# Altium PCB MemoryBoard_AT25DFxxx-SS.PcbDoc
Units mm, origin at the board's own origin, x right, y up, seen from the top; angles counter-clockwise.
Board outline 44 x 44 mm, 2 copper layers (Top Layer, Bottom Layer), stack 1.571 mm thick; 12 components, 10 nets, 82 pads, 4 vias.
Unrouted connection lines stored in the file: 12.
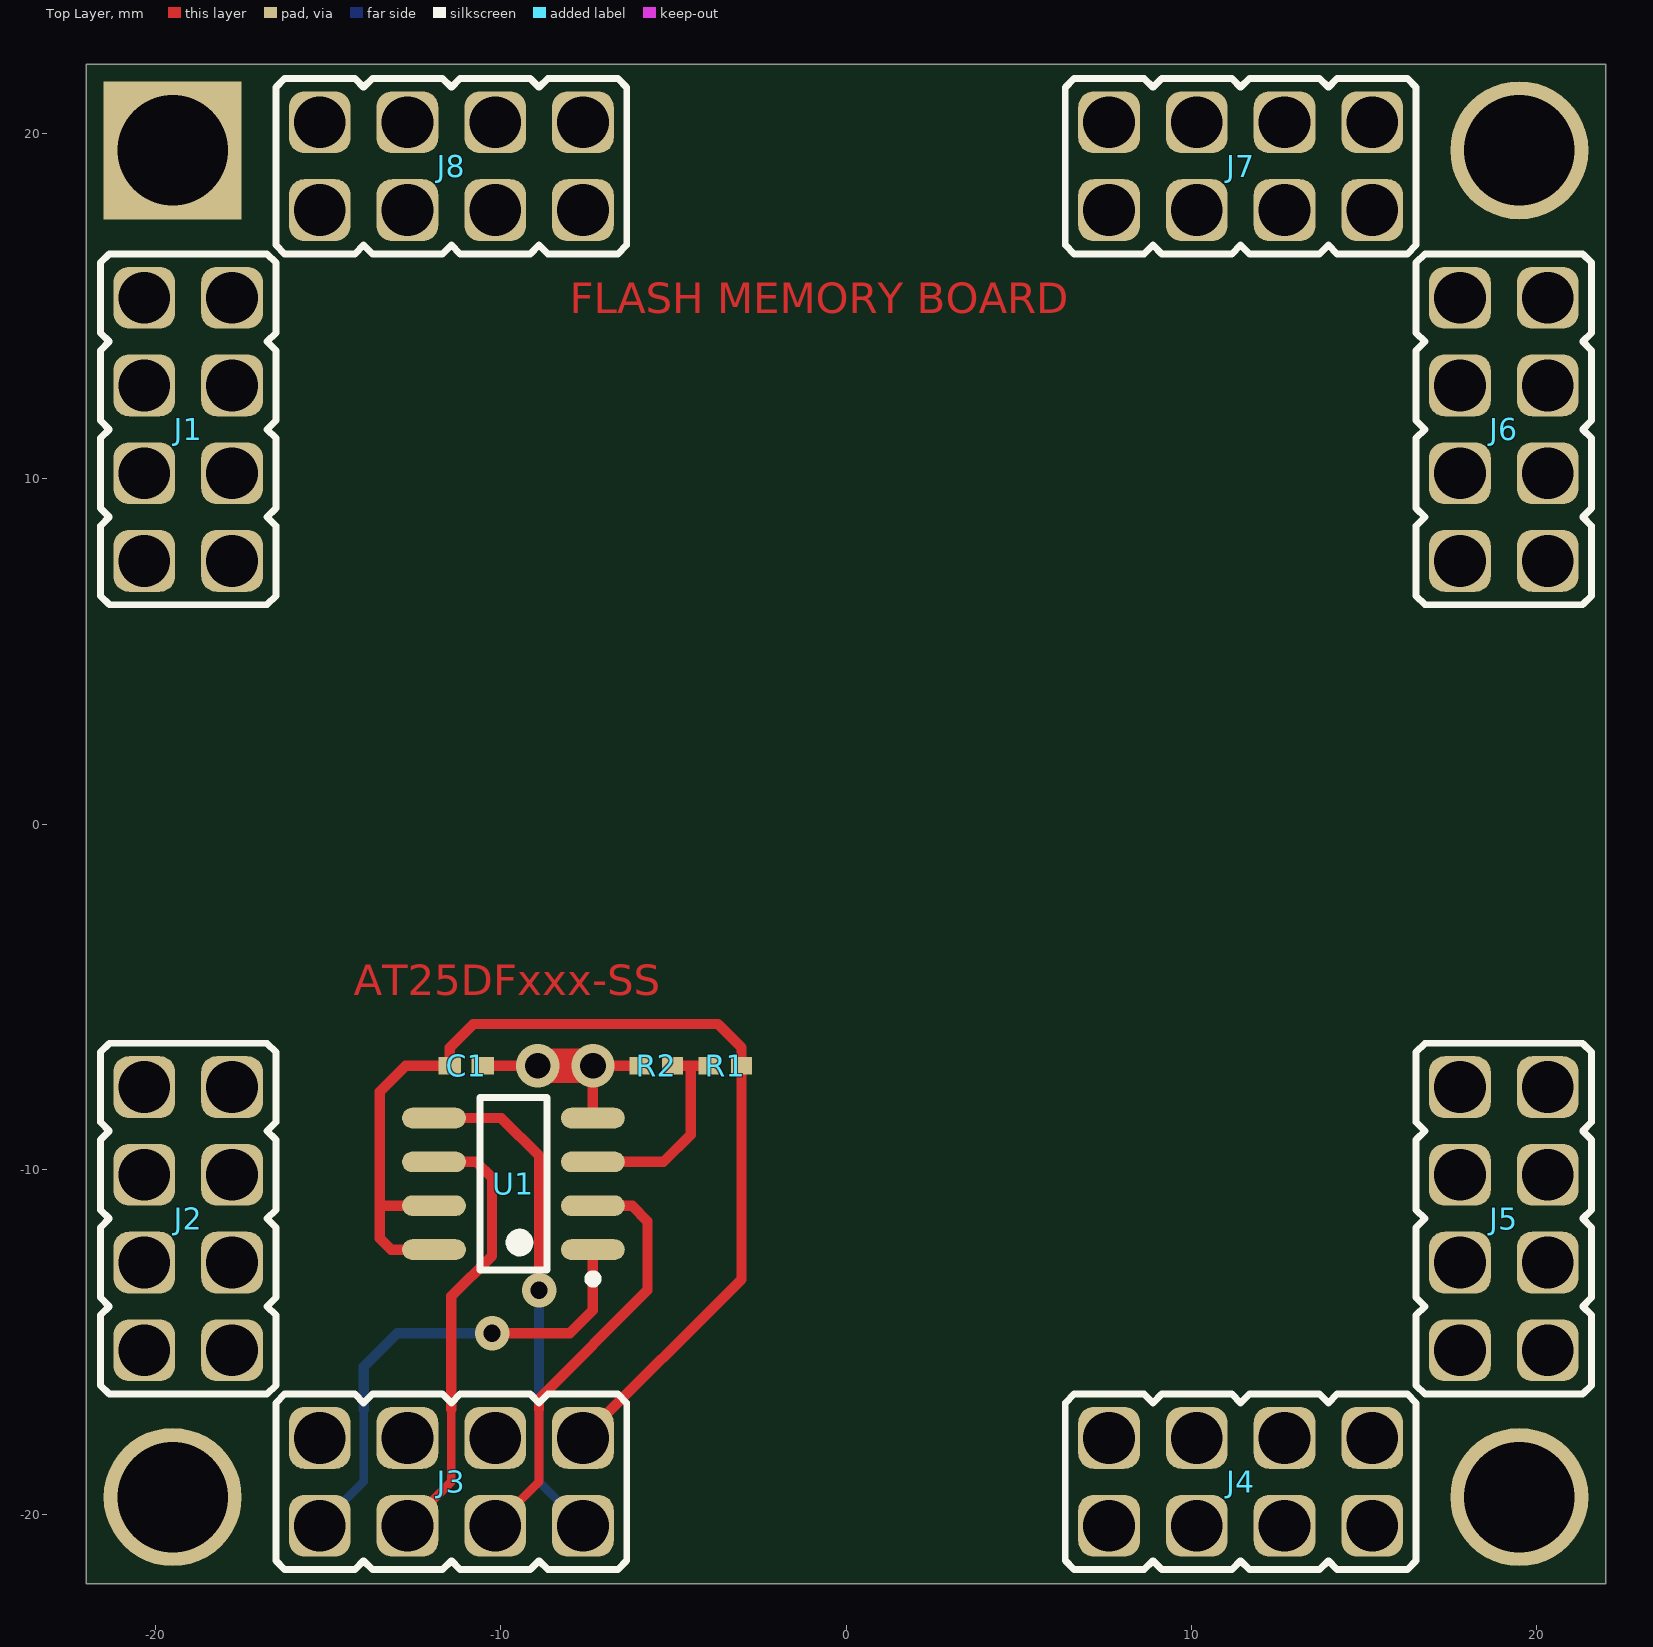
[diagram p0: Top Layer view]
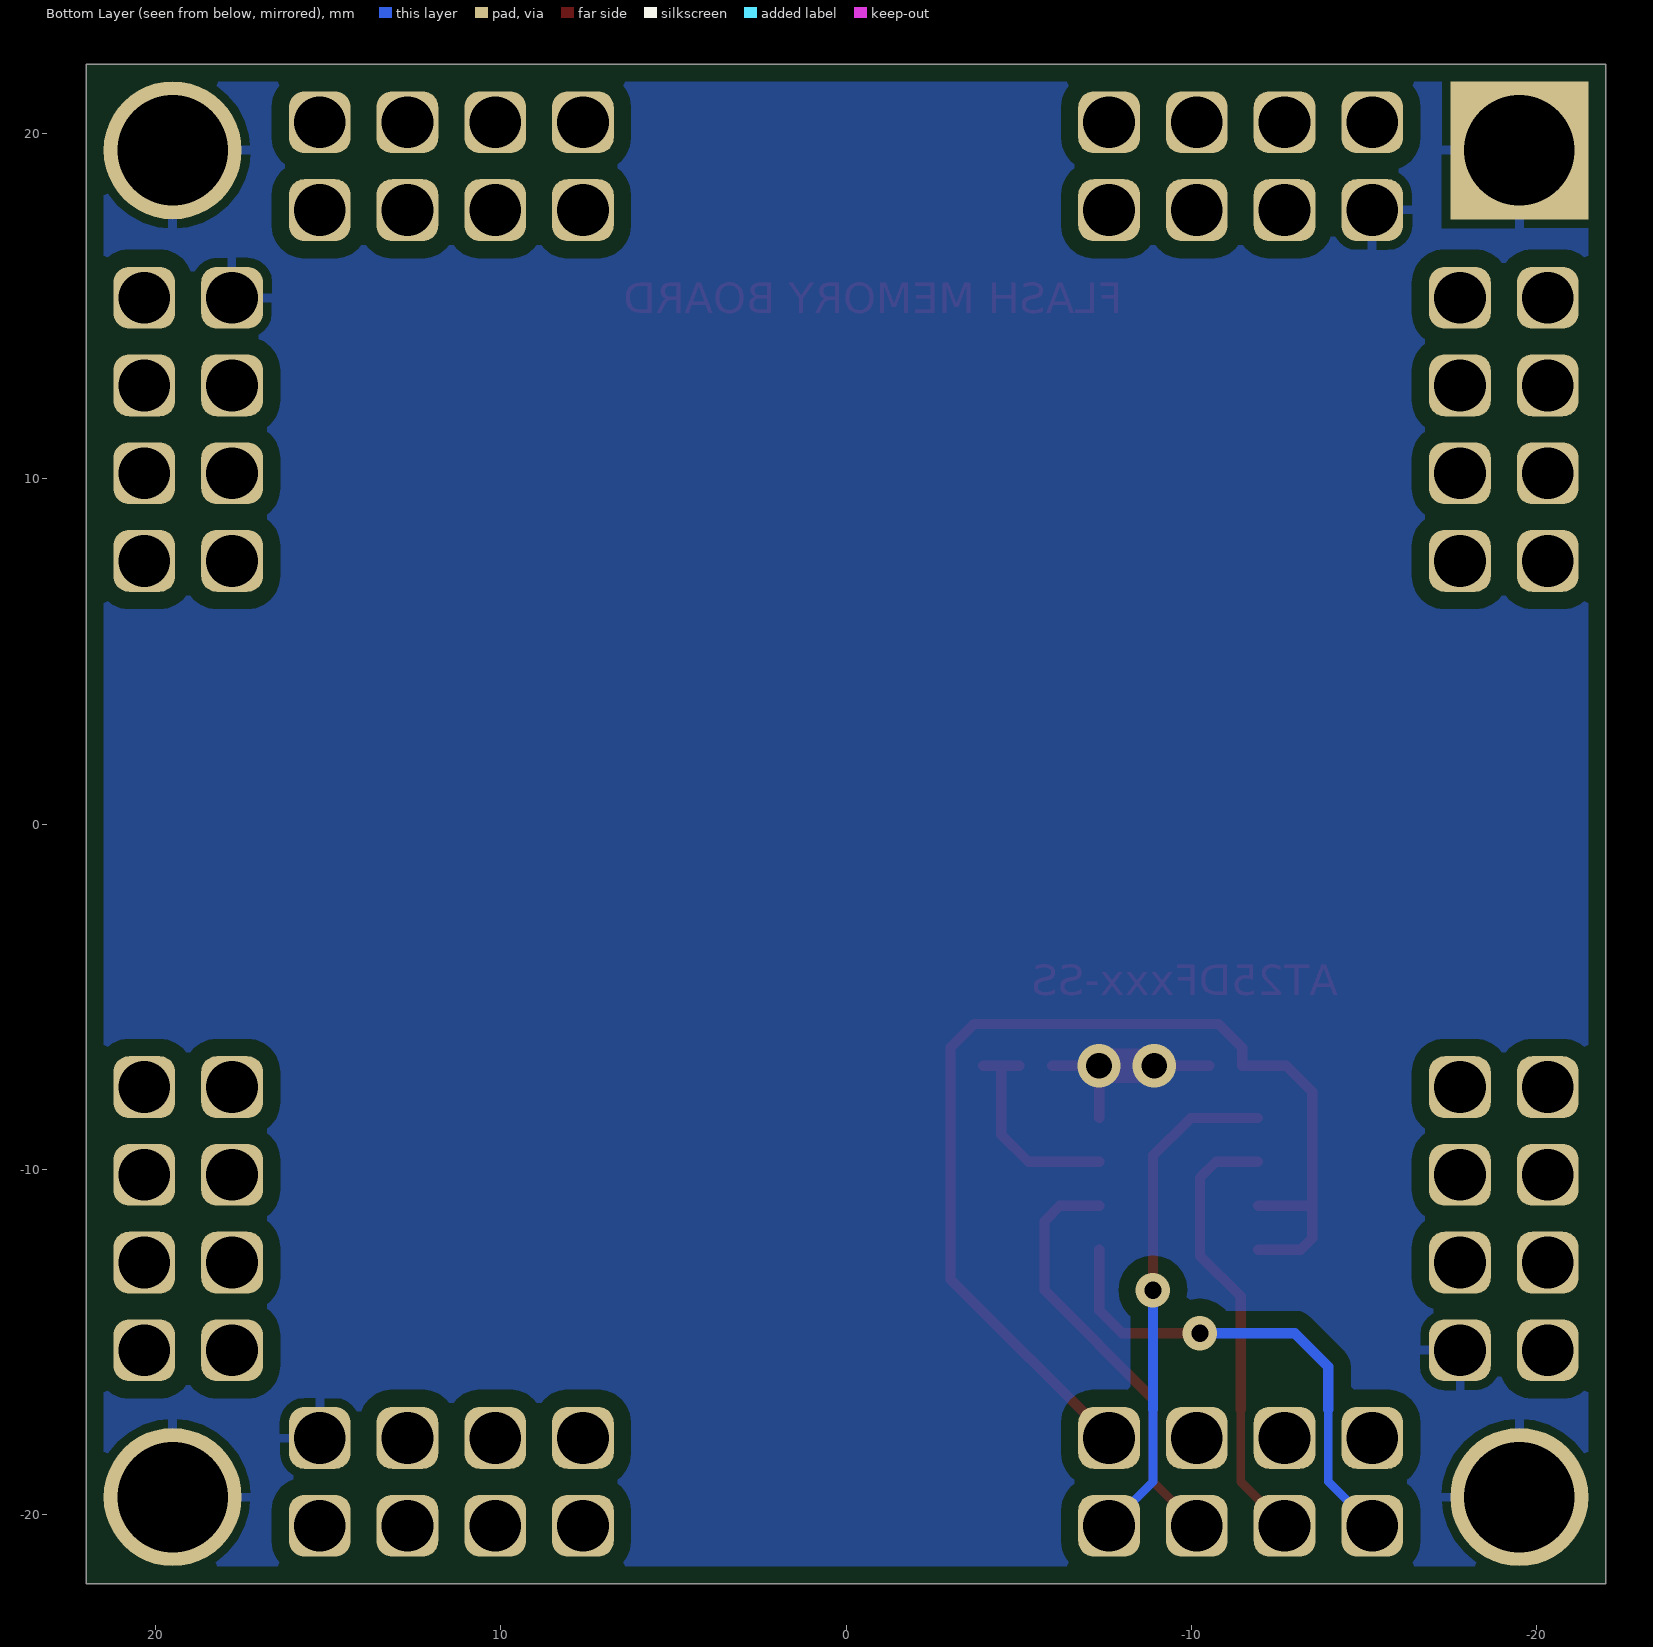
[diagram p1: Bottom Layer view, seen from below]

## Layer stack, top to bottom
Top Solder: solder mask 0.0102, Solder Resist, Dk 3.5
Top Layer: signal copper 0.0356
Dielectric 1: dielectric 1.5, FR-4, Dk 4.8
Bottom Layer: signal copper 0.0356
Bottom Solder: solder mask 0.0102, Solder Resist, Dk 3.5

## Board outline
-22,-22 22,-22 22,22 -22,22

## Design rules (kind name [scope] priority, off if disabled: settings)
Clearance Clearance_Polygon(GND) [InPolygon and InNet('GND')] p1: gap=0.5
Clearance [All] p2: gap=0.25
HoleSize [All] p1: absolutevalues=TRUE maxlimit=4 minlimit=0.3 maxpercent=80.000 minpercent=20.000
PolygonConnect PolygonConnect_Via(GND) [InNet('GND') vs IsVia] p1: connectstyle=Direct reliefconductorwidth=0.254 reliefentries=4 polygonreliefangle="90 Angle" airgapwidth=0.254
PolygonConnect [All] p2: connectstyle=Relief reliefconductorwidth=0.254 reliefentries=4 polygonreliefangle="90 Angle" airgapwidth=0.254
RoutingVias [All] p1: holewidth=0.5 width=1 viastyle="Through Hole" minholewidth=0.5 minwidth=1 maxholewidth=1.5 maxwidth=2
SolderMaskExpansion [All] p1: expansion=0.102
Width [All] p1: maxlimit=2 minlimit=0.25 preferedwidth=0.3
28 further rules are at their usual default settings.

## Components (designator, comment, footprint, x,y, rotation, side; value= is the part's Value field where it differs from the comment)
C1 "0.1/25" CAP0402 -11,-7 r180 top
J1 "LEFT" PBDM-8 -19.05,11.43 r270 top
J2 "LEFT" PBDM-8 -19.05,-11.43 r270 top
J3 "BOTTOM" PBDM-8 -11.43,-19.05 r0 top
J4 "BOTTOM" PBDM-8 11.43,-19.05 r0 top
J5 "RIGHT" PBDM-8 19.05,-11.43 r90 top
J6 "RIGHT" PBDM-8 19.05,11.43 r90 top
J7 "TOP" PBDM-8 11.43,19.05 r180 top
J8 "TOP" PBDM-8 -11.43,19.05 r180 top
R1 "10k" RES0402 -3.5,-7 r180 top
R2 "0" RES0402 -5.5,-7 r180 top
U1 "AT25DF041A-SS" SO8 -9.63,-10.42 r180 top

## Footprints (in the part's own frame and the unit in brackets; to place one, negate y for a bottom-side part, rotate by r counter-clockwise, add the part's x,y. Pads: shape width x height; smd on the part's side, far side on the other; paste and mask are expansions set on the pad)
CAP0402 [mm]
  rect 0.65x0.5 smd: 1(-0.475,0) 2(0.475,0)
  body extent -0.55,-0.3 0.55,0.3, height 0.5
PBDM-8 [mm] "5-pin interboard connector, pitch 2.54 mm"
  rrect50% 1.79x1.79 hole 1.5: 1(-3.81,-1.27) 2(-3.81,1.27) 3(-1.27,-1.27) 4(-1.27,1.27) 5(1.27,-1.27) 6(1.27,1.27) 7(3.81,-1.27) 8(3.81,1.27)
  silkscreen extent -5.08,-2.54 5.08,2.54, body extent -5.08,-2.54 5.08,2.54, height 3
RES0402 [mm]
  rect 0.6x0.5 smd: 1(-0.475,0) 2(0.475,0)
  body extent -0.53,-0.28 0.53,0.28, height 0.35
SO8 [mm] "SOIC, 8-Leads, Body 4,90x3,90mm, Pitch 1,27mm, IPC High Density"
  oval 1.85x0.6 smd: 1(-2.3,1.905) 2(-2.3,0.635) 3(-2.3,-0.635) 4(-2.3,-1.905) 5(2.3,-1.905) 6(2.3,-0.635) 7(2.3,0.635) 8(2.3,1.905)
  silkscreen extent -2.43,-2.5 0.97,2.88, body extent -3,-2.54 3,2.54, height 1.7

## Part data
C1: library part CAP0402, "Ceramic chip capacitor 0402"
J1 J2 J3 J4 J5 J6 J7 J8: library part PBDM-8, "2x4-pin header, pitch 2.54 mm"
R1 R2: library part RES0402, "Ceramic chip resistor"
U1: "4-Mbit Serial Peripheral Interface Serial Flash Memory"

## Free pads (board coordinates)
  round 4 hole 3.2: 0(-19.5,-19.491) 0(19.5,-19.491) 0(19.5,19.509)
  rect 4x4 hole 3.2: 0(-19.5,19.509)

## Via types
v1: diameter 1, hole 0.5, Top Layer to Bottom Layer, 2 vias
v2: diameter 1.25, hole 0.75, Top Layer to Bottom Layer, 2 vias

## Nets (pads, with @x,y where several pads share a name; then routed paths per layer and width w, separated by ;. In a path a pad name is that pad's centre, name@x,y a point inside that pad or via, vN(x,y) a via of type N, cw(c..) or ccw(c..) an arc to the next point about the centre after c; other vN are vias at no path point)
+5V: J1.6 J3.6 J5.6 J7.6
+12V: J1.2 J3.2 J5.2 J7.2
GND: C1.1 J2.8 J4.8 J6.8 J8.8 pad.0 R2.2 U1.4 | length 6.1
  Top Layer w0.3: C1.1 v2(-8.928,-7) ; U1.4 v2(-7.33,-7) R2.2
  Top Layer w1: v2(-8.928,-7) v2(-7.33,-7)
MISO: J3.5 U1.2 | length 12.4
  Top Layer w0.25: J3.5 -8.89,-19.05 -8.89,-16.956
  Top Layer w0.3: -8.89,-16.956 -8.89,-16.64 -5.75,-13.5 -5.75,-11.5 -6.195,-11.055 U1.2
MOSI: J3.7 U1.5 | length 14.7
  Top Layer w0.3: U1.5 -9.985,-8.515 -8.89,-9.61 v1(-8.89,-13.5)
  Bottom Layer w0.25: -8.89,-16.956 -8.89,-19.05 J3.7
  Bottom Layer w0.3: -8.89,-16.956 v1(-8.89,-13.5)
NetR1_2: R1.2 R2.1 U1.3 | length 6.2
  Top Layer w0.3: U1.3 -5.285,-9.785 -4.5,-9 -4.5,-7 ; R2.1 -4.5,-7 ; R1.2 -4.5,-7
S\S\: J3.1 U1.1 | length 14.2
  Top Layer w0.3: v1(-10.25,-14.75) -8,-14.75 -7.33,-14.08 U1.1
  Bottom Layer w0.25: J3.1 -13.97,-19.05 -13.97,-16.956
  Bottom Layer w0.3: -13.97,-16.956 -13.97,-15.72 -13,-14.75 v1(-10.25,-14.75)
SCK: J3.3 U1.6 | length 13
  Top Layer w0.25: J3.3 -11.43,-19.05 -11.43,-16.956
  Top Layer w0.3: U1.6 -10.715,-9.785 -10.25,-10.25 -10.25,-12.5 -11.43,-13.68 -11.43,-16.956
VBAT: J1.4 J3.4 J5.4 J7.4
VCC: C1.2 J1.8 J3.8 J5.8 J7.8 R1.1 U1.7 U1.8 | length 32.6
  Top Layer w0.3: U1.8 -13.175,-12.325 -13.5,-12 -13.5,-11.055 ; U1.7 -13.5,-11.055 ; J3.8 -3.025,-13.185 R1.1 -3.025,-6.475 -3.706,-5.794 -10.794,-5.794 -11.475,-6.475 C1.2 -12.75,-7 -13.5,-7.75 -13.5,-11.055
pads on no net: J1.1 J1.3 J1.5 J1.7 J2.1 J2.2 J2.3 J2.4 J2.5 J2.6 J2.7 J4.1 J4.2 J4.3 J4.4 J4.5 J4.6 J4.7 J5.1 J5.3 J5.5 J5.7 J6.1 J6.2 J6.3 J6.4 J6.5 J6.6 J6.7 J7.1 J7.3 J7.5 J7.7 J8.1 J8.2 J8.3 J8.4 J8.5 J8.6 J8.7

## Polygon pours and split planes (outlines as drawn)
GND on Bottom Layer "Bottom-GND" (solid, remove dead copper, pour order 2): -21.5,-21.5 21.5,-21.5 21.5,21.5 -21.5,21.5

## Other copper
Top Layer:
  text "FLASH MEMORY BOARD" at -8,14.5 h1.52
  text "AT25DFxxx-SS" at -14.25,-5.25 h1.52

## Silkscreen, mask and mechanical layers (free items; w line width, h text height)
Board:
  the board outline again, w0.2